# Altium PCB EST_MainV20.PcbDoc (part 7 of 8)
Units mm, origin at the board's own origin, x right, y up, seen from the top; angles counter-clockwise.
Board outline 69.72 x 115.32 mm, 2 copper layers (Top Layer, Bottom Layer); 330 components, 239 nets, 1066 pads, 416 vias.
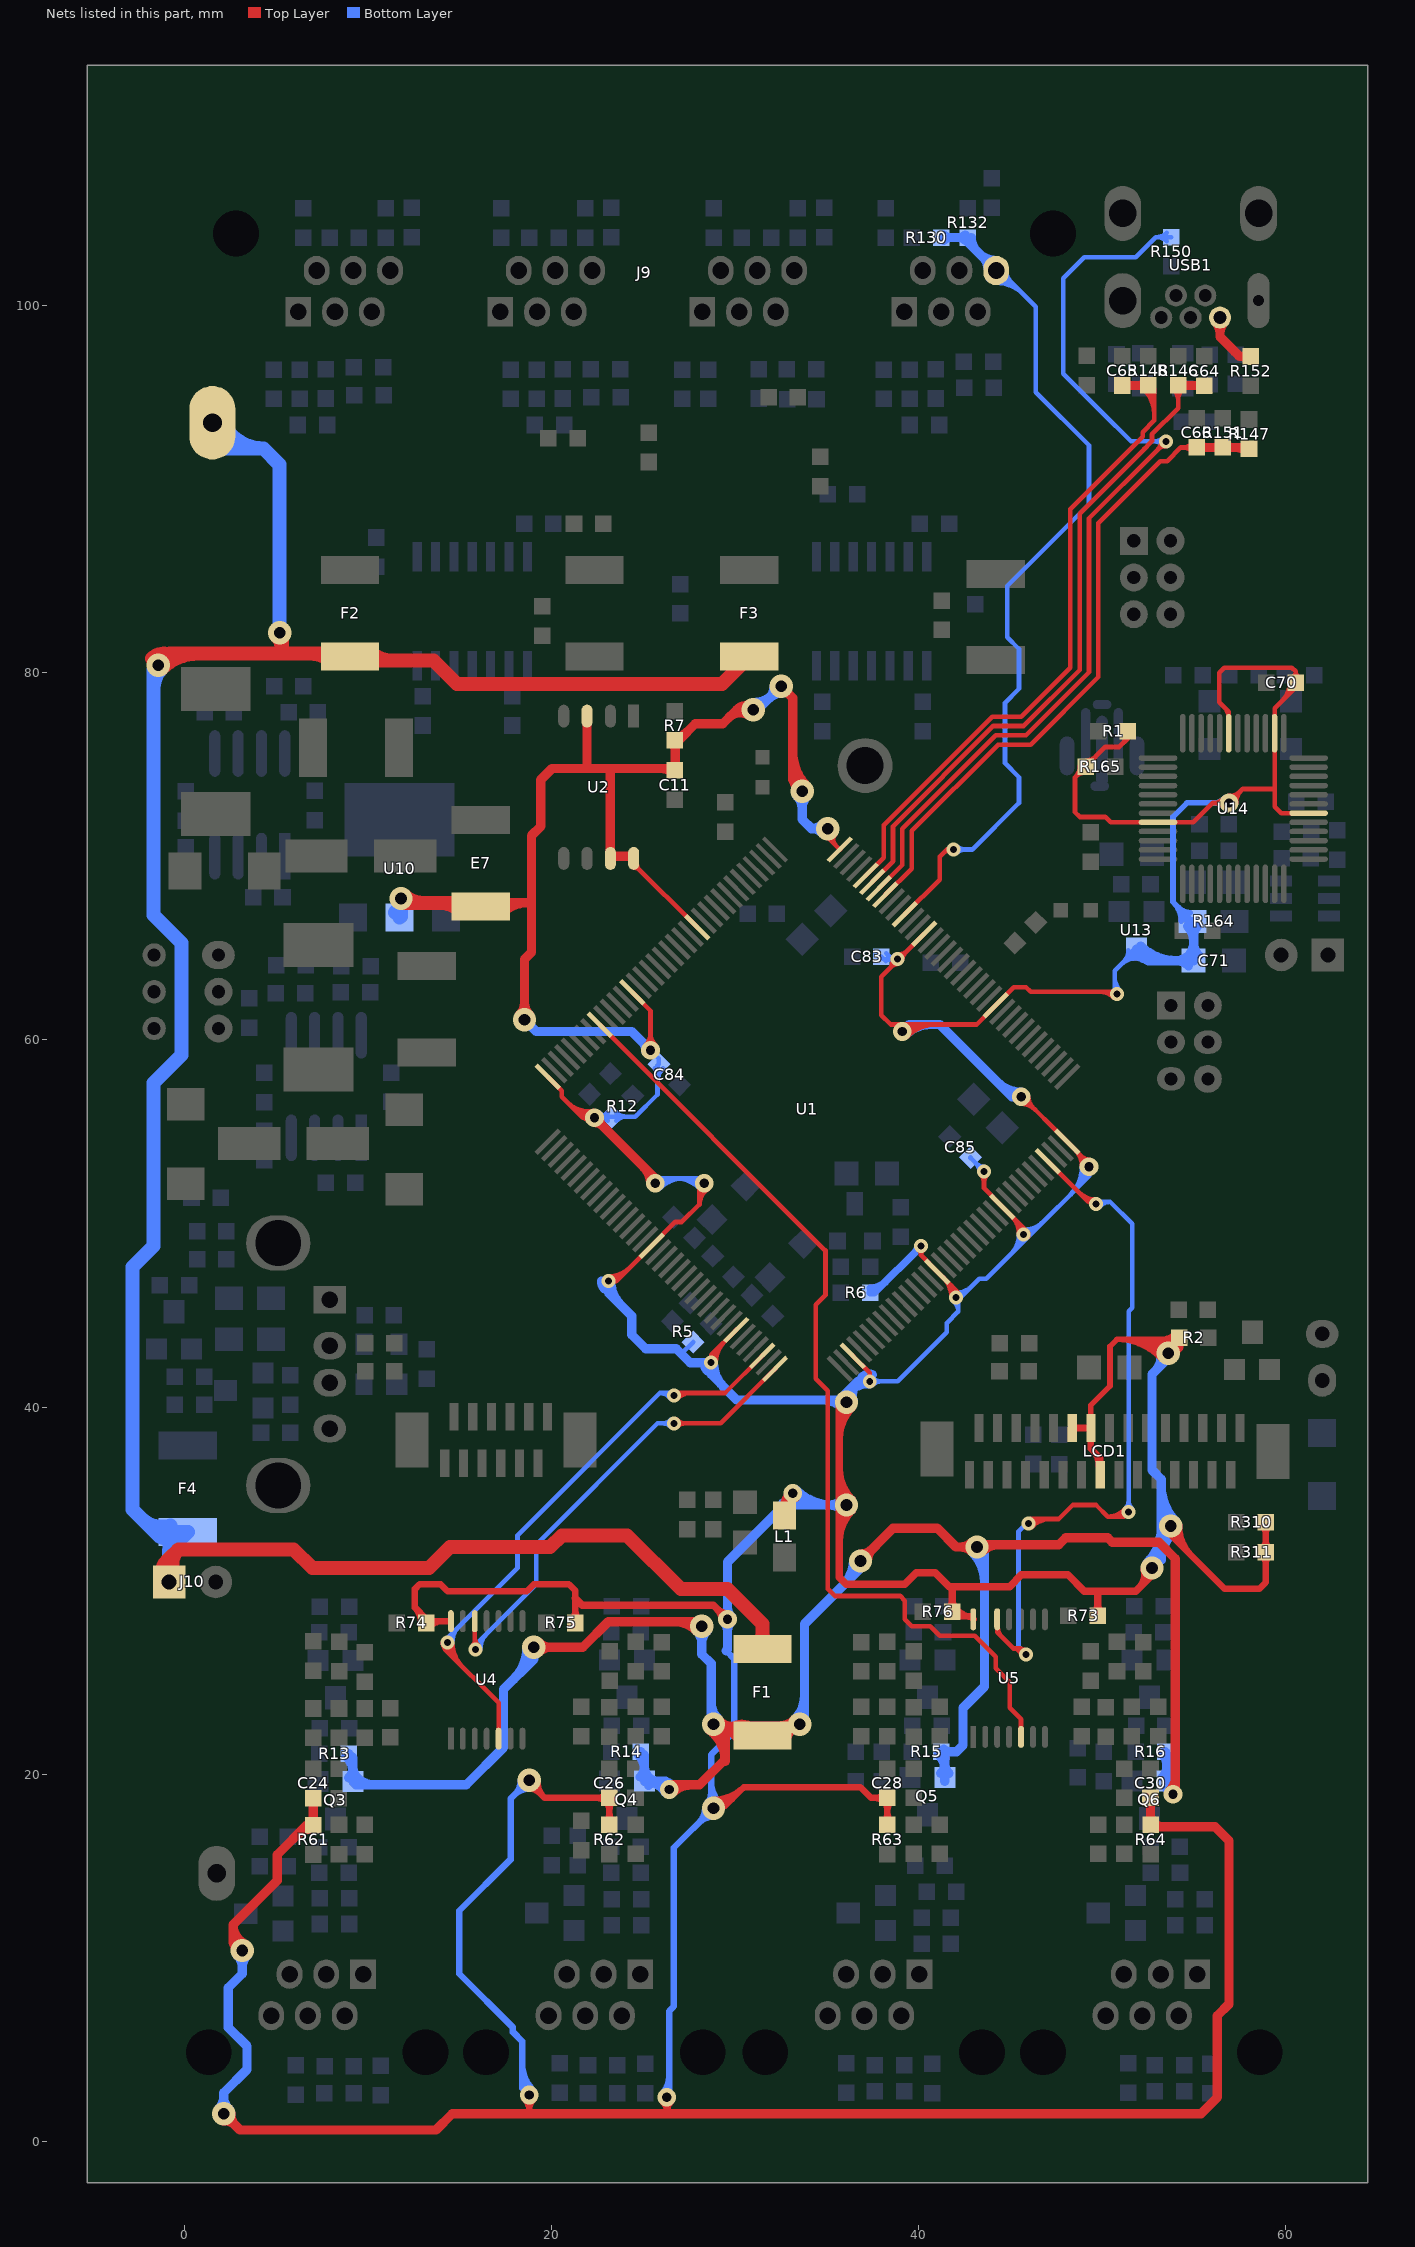
[diagram p7: the nets of this part, all layers, seen from the top]

## Via types
v1: diameter 0.762, hole 0.381, Top Layer to Bottom Layer, 258 vias
v2: diameter 1.27, hole 0.635, Top Layer to Bottom Layer, 91 vias
v3: diameter 1.016, hole 0.508, Top Layer to Bottom Layer, 66 vias
v4: diameter 1.524, hole 0.635, Top Layer to Bottom Layer, 1 vias

## Nets (pads, with @x,y where several pads share a name; then routed paths per layer and width w, separated by ;. In a path a pad name is that pad's centre, name@x,y a point inside that pad or via, vN(x,y) a via of type N, cw(c..) or ccw(c..) an arc to the next point about the centre after c; other vN are vias at no path point) (continued)
TACHOD1: J9.24 R130.1 R132.2 U1.98 | length 56.4
  Top Layer w0.254: U1.98@39.251,66.826 41.148,68.723 41.148,69.977 41.529,70.358 v1(41.91,70.358) ccw(c41.826,69.657) 41.327,70.156
  Bottom Layer w0.254: v1(41.91,70.358) 42.926,70.358 45.466,72.898 45.466,74.295 44.704,75.057 44.704,78.359 45.466,79.121 45.466,81.28 44.831,81.915 44.831,84.709 49.276,89.154 49.276,92.369 46.38,95.265 46.38,99.924 44.914,101.39 J9.24@44.221,101.39 ; v1@42.09,70.178 cw(c42.523,69.745) 42.523,70.358 cw(c42.523,70.971) v1@42.09,70.538 ; J9.24@43.819,101.39 J9.24@44.221,101.39 ; J9.24@44.221,101.217 cw(c44.221,99.125) 45.7,100.604 ; J9.24@44.221,101.471 cw(c44.221,99.992) 45.266,101.038 ; J9.24@44.406,101.39 J9.24@44.221,101.39 ; J9.24@44.794,101.79 ccw(c45.469,101.79) 44.992,101.312
  Bottom Layer w0.508: R130.1@41.224,103.682 R132.2@42.672,103.683 ; R130.1@41.363,103.544 cw(c41.699,103.208) 41.699,103.683 ; R130.1@41.363,103.821 ccw(c41.696,104.154) 41.696,103.683 ; R132.2@42.534,103.544 ccw(c42.199,103.21) 42.199,103.683 ccw(c42.199,104.156) R132.2@42.534,103.822 ; R132.2@42.672,103.438 J9.24@44.221,101.89 ; R132.2@42.868,103.683 ccw(c43.932,103.683) 43.18,102.931 ; 43.289,102.822 ccw(c44.221,103.754) J9.24@44.221,102.436 ; 43.53,102.58 cw(c42.94,101.99) J9.24@43.775,101.99 ; J9.24@44.221,101.39 J9.24@44.221,101.448
TXINA: U1.34 U4.5 | length 37
  Top Layer w0.254: v1@14.097,27.178 ccw(c14.71,27.178) 14.277,26.744 ; v1@14.224,27.178 14.224,26.797 17.129,23.892 U4.5@17.129,21.946 ; v1(14.351,27.178) ccw(c15.577,27.178) 14.71,26.311 ; v1@14.605,27.178 ccw(c16.445,27.178) 15.144,25.877 ; v1(26.67,40.64) 26.797,40.767 29.455,40.767 U1.34@31.472,42.784 ; v1@26.85,40.46 cw(c27.59,39.72) 27.59,40.767
  Bottom Layer w0.254: v1@14.224,27.178 14.224,27.305 18.161,31.242 18.161,33.02 25.908,40.767 ; v1(14.351,27.178) cw(c14.964,27.178) 14.531,27.612 ; v1@14.605,27.178 cw(c15.831,27.178) 14.964,28.045 ; v1@26.467,40.488 ccw(c25.908,40.069) 25.908,40.767 ; v1@26.543,40.767 25.908,40.767
TXINB: U1.36 U4.12 | length 29.9
  Top Layer w0.254: v1@15.695,26.977 ccw(c15.373,27.299) 15.829,27.299 ; 15.829,27.522 ccw(c16.6,27.522) v1@16.055,26.977 ; U4.12@15.829,28.346 15.829,26.843 v1(15.875,26.797) ; v1(26.67,39.116) 29.218,39.116 U1.36@32.18,42.077 ; v1@26.85,38.936 cw(c27.283,38.503) 27.283,39.116 cw(c27.283,39.729) v1@26.85,39.296
  Bottom Layer w0.254: 16.055,27.231 ccw(c16.488,26.797) v1(15.875,26.797) 15.875,27.051 19.177,30.353 19.177,32.512 25.781,39.116 v1(26.67,39.116) ; v1@16.129,26.797 cw(c17.355,26.797) 16.488,27.664 ; v1@26.49,38.936 ccw(c26.057,38.503) 26.057,39.116 ccw(c26.057,39.729) v1@26.49,39.296
TXINC: U1.136 U5.5 | length 52.7
  Top Layer w0.254: U1.136@22.634,60.816 34.925,48.524 34.925,46.101 34.392,45.568 34.392,41.554 35.052,40.894 35.052,31.115 35.052,30.099 35.433,29.718 38.989,29.718 39.243,29.464 39.243,28.448 39.624,28.067 40.64,28.067 41.148,27.559 43.053,27.559 44.196,26.416 44.196,25.781 44.831,25.146 ; 44.704,25.273 44.831,25.146 ; U5.5@45.577,22.047 45.577,23.003 44.958,23.622 44.958,25.019 44.831,25.146
TXIND: U1.69 U5.12 | length 46.9
  Top Layer w0.254: U5.12@44.277,28.447 44.277,27.732 45.149,26.86 ; U5.12@44.31,28.007 ccw(c45.053,28.007) 44.528,27.481 ; 45.459,26.86 cw(c45.459,26.465) v1(45.847,26.543) 45.53,26.86 45.149,26.86 ; v1@45.598,26.493 ccw(c45.149,26.402) 45.149,26.861 ; v1(45.974,33.655) cw(c46.587,33.042) 46.587,33.909 ; v1@46.101,33.909 47.625,33.909 48.387,34.671 49.657,34.671 50.292,34.036 ; v1@46.154,33.475 cw(c47.2,32.429) 47.2,33.909 ; U1.69@47.029,53.391 49.239,51.181 v1@49.784,51.181 ; 48.726,51.694 ccw(c49.657,52.624) v1@49.657,51.308 ; 49.16,51.26 ccw(c49.657,51.757) v1(49.657,51.054) ; 50.864,34.036 ccw(c50.864,34.806) v1(51.435,34.29) 51.181,34.036 50.292,34.036 ; v1@51.246,34.46 cw(c50.292,35.322) 50.292,34.036
  Bottom Layer w0.254: v1(45.847,26.543) 45.441,26.949 45.441,33.249 v1@46.101,33.909 ; v1@49.784,51.181 50.419,51.181 ; v1@49.86,50.902 cw(c50.419,50.483) 50.419,51.181 ; v1@51.255,34.47 ccw(c50.822,34.903) 51.435,34.903 ccw(c52.048,34.903) v1@51.615,34.47 ; v1(51.435,34.29) 51.435,45.212 51.626,45.403 51.626,49.975 50.419,51.181
USB_DET: C66.2 R147.1 R151.2 U1.101 | length 40.1
  Top Layer w0.254: U1.101@38.19,67.887 39.624,69.321 39.624,71.374 44.323,76.073 46.101,76.073 49.784,79.756 49.784,88.138 53.15,91.504 53.531,91.504 54.283,92.256 C66.2@55.147,92.256 ; C66.2@54.919,92.028 ccw(c54.368,91.476) 54.368,92.256 ccw(c54.368,93.036) C66.2@54.919,92.484
  Top Layer w0.508: C66.2@55.147,92.256 57.909,92.256 R147.1@57.989,92.177 ; C66.2@55.286,92.117 cw(c55.621,91.783) 55.621,92.256 cw(c55.621,92.729) C66.2@55.286,92.395 ; 56.085,92.256 cw(c56.085,91.773) R151.2@56.427,92.114 ; 56.099,92.256 ccw(c56.099,92.719) R151.2@56.427,92.392 ; R151.2@56.704,92.114 cw(c57.046,91.773) 57.046,92.256 ; R151.2@56.704,92.392 ccw(c57.031,92.719) 57.031,92.256 ; 57.324,92.256 cw(c57.324,91.512) R147.1@57.85,92.038
USB_P: R152.1 USB1.1 | length 5.5
  Top Layer w0.508: USB1.1@56.165,99.082 cw(c55.575,98.491) 56.41,98.491 cw(c57.245,98.491) USB1.1@56.655,99.082 ; USB1.1@56.41,99.327 56.41,98.276 57.214,97.472 ; 57.433,97.253 57.214,97.472 ; R152.1@57.951,97.067 ccw(c57.616,96.733) 57.616,97.206 ccw(c57.616,97.679) R152.1@57.951,97.344 ; R152.1@58.089,97.206 57.48,97.206 57.214,97.472
USBDM: C64.2 R146.1 U1.103 | length 38.9
  Top Layer w0.254: U1.103@37.483,68.594 38.608,69.719 38.608,71.628 44.069,77.089 45.72,77.089 48.768,80.137 48.768,88.646 52.197,92.075 ; 52.324,92.202 52.197,92.075 ; R146.1@53.899,95.403 cw(c53.348,94.851) 54.128,94.851 cw(c54.908,94.851) R146.1@54.356,95.403 ; R146.1@54.128,95.631 54.128,94.387 52.705,92.964 52.705,92.583 52.197,92.075
  Top Layer w0.508: R146.1@54.128,95.631 55.532,95.631 C64.2@55.554,95.609 ; R146.1@54.266,95.492 cw(c54.601,95.158) 54.601,95.631 cw(c54.601,96.104) R146.1@54.266,95.77 ; 55.027,95.631 cw(c55.027,95.082) C64.2@55.415,95.47
USBDP: C65.1 R148.1 U1.104 | length 40.7
  Top Layer w0.254: U1.104@37.129,68.947 38.1,69.918 38.1,71.695 44.002,77.597 45.593,77.597 48.26,80.264 48.26,88.9 52.197,92.837 52.197,93.091 52.832,93.726 52.832,95.174 52.502,95.504 R148.1@52.502,95.631 ; R148.1@52.274,95.403 cw(c50.926,94.055) 52.832,94.055 ; R148.1@52.453,95.582 cw(c51.539,94.668) 52.832,94.668 ; R148.1@52.548,95.311 cw(c52.585,95.054) 52.768,95.238 cw(c52.872,95.342) R148.1@52.757,95.432 ; R148.1@52.633,95.762 cw(c52.153,95.281) R148.1@52.832,95.281
  Top Layer w0.508: C65.1@51.078,95.631 R148.1@52.502,95.631 ; C65.1@51.214,95.489 cw(c51.556,95.148) 51.556,95.631 ; C65.1@51.214,95.767 ccw(c51.541,96.094) 51.541,95.631 ; R148.1@52.364,95.492 ccw(c52.029,95.158) 52.029,95.631 ccw(c52.029,96.104) R148.1@52.364,95.77
USBID: R150.1 U1.102 | length 56.7
  Top Layer w0.254: U1.102@37.836,68.24 39.116,69.52 39.116,71.501 44.196,76.581 45.847,76.581 49.276,80.01 49.276,88.392 52.959,92.075 ; 53.086,92.202 52.959,92.075 ; v1@53.213,92.583 cw(c52.6,92.583) 53.033,92.149 cw(c53.467,91.716) v1@53.467,92.329 ; v1(53.467,92.583) 52.959,92.075
  Bottom Layer w0.254: 48.26,95.885 49.975,94.17 ; v1@53.287,92.403 ccw(c52.854,91.97) 52.854,92.583 ccw(c52.854,93.196) v1@53.287,92.763 ; v1(53.467,92.583) 51.562,92.583 49.975,94.17 ; R150.1@53.518,103.48 ccw(c52.967,102.928) 52.967,103.708 ccw(c52.967,104.488) R150.1@53.518,103.937 ; R150.1@53.747,103.708 52.908,103.708 51.816,102.616 49.022,102.616 47.879,101.473 47.879,96.266 49.975,94.17
V9: F1.2 Q3.1 Q4.1 Q5.1 Q6.1 R13.1 R14.1 R15.1 R16.1 | length 157.6
  Top Layer w0.508: v2(19.05,26.924) 20.701,26.924 ; 19.685,26.924 20.701,26.924 ; 23.368,28.321 26.289,28.321 ; v3@26.416,19.431 28.067,19.431 29.464,20.828 29.464,22.225 29.845,22.606 ; v3@26.596,18.997 cw(c27.642,17.951) 27.642,19.431 ; 26.661,28.321 cw(c26.661,26.534) v2@27.925,27.798 ; v2@28.194,28.321 26.289,28.321 ; v2@28.603,22.426 cw(c27.353,20.725) 29.464,20.725 ; v2@28.904,22.835 cw(c28.091,21.729) 29.464,21.729 ; v2@29.134,22.962 ccw(c29.845,23.495) 29.845,22.606 ; 29.665,22.426 cw(c30.381,21.711) F1.2@30.962,22.539 ; 29.773,22.606 cw(c29.773,21.531) F1.2@30.67,22.123 ; F1.2@30.247,21.843 ccw(c28.829,20.907) 28.829,22.606 29.845,22.606 ; F1.2@31.293,22.606 29.845,22.606 ; F1.2@31.394,22.631 29.87,22.631 29.845,22.606 ; F1.2@31.496,22.631 v2@33.68,22.631 ; F1.2@32.321,22.123 cw(c33.001,21.923) F1.2@33.001,22.631 ; F1.2@32.363,22.631 ccw(c32.363,23.898) v2@33.259,23.002 ; F1.2@32.809,21.98 cw(c33.68,21.723) v2@33.68,22.631 ; F1.2@32.853,22.631 cw(c32.853,22.058) v2@33.259,22.464 ; v2@33.782,22.733 v2@33.68,22.631 ; v2(36.83,31.623) 38.608,33.401 41.021,33.401 42.037,32.385 v2(43.18,32.385) 43.307,32.512 44.45,32.512 47.625,32.512 48.006,32.893 50.292,32.893 50.546,32.639 53.086,32.639 53.975,31.75 53.975,30.988 ; v2@36.83,32.004 ccw(c36.83,32.924) 37.48,32.273 ccw(c38.131,31.623) v2@37.211,31.623 ; v2@42.911,32.116 ccw(c42.26,31.465) 42.26,32.385 ccw(c42.26,33.305) v2@42.911,32.654 ; v2@43.449,32.116 cw(c44.406,31.159) 44.406,32.512 ; v3@53.668,19.103 ccw(c52.928,19.843) 53.975,19.843 ; v3@53.975,19.177 53.975,30.988 ; 53.975,31.623 53.975,30.988 ; 19.97,26.924 cw(c19.97,27.844) 19.319,27.193 ccw(c19.97,27.844) 19.97,26.924 ; 19.97,26.924 ccw(c19.97,26.004) 19.319,26.655 cw(c19.97,26.004) 19.97,26.924 ; 20.701,26.924 21.717,26.924 23.114,28.321 26.289,28.321
  Bottom Layer w0.508: R13.1@8.833,20.987 cw(c7.946,20.1) Q3.1@9.2,20.1 ; R13.1@8.971,21.125 9.2,20.897 Q3.1@9.2,19.602 9.366,19.435 15.371,19.435 17.399,21.463 17.399,24.638 19.05,26.289 v2(19.05,26.924) ; Q3.1@8.975,19.826 ccw(c8.433,20.368) 9.2,20.368 ccw(c9.966,20.368) 9.424,19.826 ccw(c10.368,20.769) 10.368,19.435 ; 17.951,25.19 ccw(c16.216,26.924) v2@18.669,26.924 ; 18.818,26.057 ccw(c17.951,26.924) v2@19.177,26.924 ; R14.1@24.728,21.095 cw(c23.903,20.27) 25.07,20.27 ; Q4.1@24.845,19.859 ccw(c24.303,20.401) 25.07,20.401 ccw(c25.836,20.401) 25.294,19.859 ccw(c25.836,20.401) 25.836,19.634 ccw(c25.836,18.868) Q4.1@25.294,19.41 ; R14.1@24.867,21.234 25.07,21.031 Q4.1@25.07,19.634 ; 26.031,19.634 cw(c26.031,18.915) v3@26.626,19.32 ; v3@26.206,19.034 ccw(c25.07,18.259) Q4.1@25.07,19.634 ; v3@26.416,19.431 26.213,19.634 Q4.1@25.07,19.634 ; v2@27.925,27.798 cw(c27.274,27.147) 28.194,27.147 cw(c29.114,27.147) v2@28.463,27.798 ; v2@28.194,28.321 v2(28.194,28.067) 28.194,26.543 28.702,26.035 28.702,22.86 v2(28.829,22.733) ; 28.702,23.959 ccw(c30.055,23.959) v2@29.098,23.002 ; v2@33.259,23.002 ccw(c31.995,24.266) 33.782,24.266 ; v2@33.782,22.733 33.782,28.194 36.83,31.242 v2(36.83,31.623) ; 35.91,30.322 ccw(c34.609,31.623) v2@36.449,31.623 ; R15.1@41.086,21.095 cw(c40.26,20.27) Q5.1@41.427,20.27 ; Q5.1@41.203,20.062 ccw(c40.661,20.604) 41.427,20.604 ccw(c42.194,20.604) Q5.1@41.652,20.062 ; R15.1@41.363,21.095 cw(c41.697,20.761) 41.697,21.234 cw(c41.697,21.707) R15.1@41.363,21.373 ; Q5.1@41.427,19.634 41.427,21.031 R15.1@41.224,21.234 42.062,21.234 42.418,21.59 42.418,23.622 43.586,24.79 43.586,31.979 v2(43.18,32.385) ; v2@42.911,32.116 cw(c41.279,30.484) 43.586,30.484 ; v2@43.27,32.475 cw(c42.505,31.71) 43.586,31.71 ; R16.1@53.278,21.095 cw(c52.698,20.516) 53.518,20.516 ; Q6.1@53.293,19.859 ccw(c52.751,20.401) 53.518,20.401 ccw(c54.284,20.401) Q6.1@53.742,19.859 ; R16.1@53.416,21.234 53.518,21.132 Q6.1@53.518,19.634 ; v3(53.848,18.923) 53.518,19.253 Q6.1@53.518,19.634 ; Q6.1@53.897,19.172 cw(c53.989,19.634) Q6.1@53.518,19.634
  other v2: 33.528,22.733
  other v3: 26.416,19.177
V33: C11.2 C24.1 C26.1 C28.1 C30.1 C70.1 C71.2 C83.1 C84.1 C85.1 E7.1 L1.2 LCD1.16 LCD1.17 LCD1.19 R1.2 R2.1 R5.2 R6.1 R7.2 R12.2 R61.1 R62.1 R63.1 R64.1 R73.1 R74.1 R75.1 R76.1 R164.2 R165.1 R310.1 R311.1 U1.17 U1.30 U1.39 U1.52 U1.62 U1.72 U1.84 U1.95 U1.108 U1.121 U1.131 U1.144 U2.3 U2.7 U2.8 U4.14 U5.14 U10.2 U13.3 U14.6 U14.14 U14.19 U14.32 | length 722.1
  Top Layer w0.254: U1.144@19.805,57.987 20.574,57.218 20.574,56.896 21.717,55.753 ; 20.892,56.578 ccw(c22.028,57.715) v3@22.29,56.129 ; 21.241,56.229 ccw(c22.127,57.115) v3@22.331,55.878 ; 21.591,55.879 ccw(c22.226,56.514) v3@22.373,55.628 ; v3@22.016,55.574 ccw(c21.717,55.414) 21.717,55.753 ; v3@22.016,55.932 cw(c21.717,56.092) 21.717,55.753 ; v3(22.352,55.753) 21.717,55.753 ; v1@23.114,47.117 ccw(c23.114,48.735) 24.258,47.591 ; 23.825,47.157 cw(c23.114,47.868) v1(23.114,46.863) 23.53,46.863 U1.17@25.462,48.795 26.751,50.084 27.097,50.084 28.067,51.054 v3@28.067,52.451 ; U1.131@24.401,62.583 25.4,61.585 v3(25.4,59.436) ; U2.8@24.486,69.377 cw(c24.486,68.912) 24.815,69.241 ; U2.8@24.486,69.875 24.486,69.57 U1.121@27.937,66.119 ; U2.8@24.659,69.55 ccw(c25.028,69.55) 24.767,69.289 ; v3@25.131,59.705 ccw(c24.48,60.356) 25.4,60.356 ccw(c26.32,60.356) v3@25.669,59.705 ; v3@25.654,52.451 v3@25.781,52.451 ; 28.067,51.026 cw(c29.083,51.026) v3@28.529,51.878 ; 28.067,51.494 cw(c28.778,51.494) v3@28.39,52.091 ; v1@28.956,42.418 cw(c30.594,42.418) U1.30@29.436,43.576 ; 29.002,43.142 ccw(c29.727,42.418) v1(28.702,42.418) 28.702,42.842 U1.30@30.058,44.199 ; v2(35.052,71.501) 35.052,71.025 U1.108@35.715,70.362 ; v2@35.249,71.341 ccw(c35.564,71.086) 35.278,70.799 ; v2@35.447,71.181 ccw(c35.784,70.907) 35.477,70.6 ; U1.39@36.422,42.784 37.338,41.869 v1(37.338,41.402) ; 38.377,63.831 ccw(c37.819,64.389) v1@38.608,64.389 ; 38.553,64.007 cw(c38.862,63.698) v1@38.862,64.135 ; v1@38.862,64.643 ccw(c38.862,65.432) 39.42,64.874 ; v3@39.026,60.542 cw(c39.729,59.839) 39.729,60.833 ; v1@39.116,64.389 cw(c39.553,64.389) 39.244,64.698 ; v3@39.206,60.362 cw(c40.342,59.226) 40.342,60.833 ; v3@39.385,60.183 cw(c40.956,58.612) 40.956,60.833 ; v1(40.132,48.768) 40.132,48.267 ; U1.95@40.311,65.765 37.973,63.427 37.973,61.341 38.481,60.833 43.157,60.833 U1.84@44.2,61.876 45.189,62.865 45.847,62.865 46.101,62.611 50.673,62.611 v1(50.8,62.484) ; U1.52@41.329,47.07 cw(c40.233,45.974) v1@41.783,45.974 ; 41.763,46.636 cw(c41.1,45.974) v1(42.037,45.974) ; v1@42.164,45.847 42.164,46.235 U1.52@41.018,47.381 40.132,48.267 ; v1@43.381,52.652 cw(c42.948,52.219) 43.561,52.219 cw(c44.174,52.219) v1@43.741,52.652 ; v1(43.561,52.832) 43.561,51.909 U1.62@44.554,50.916 45.974,49.496 v1@45.974,49.276 ; U1.62@45.041,50.429 cw(c44.015,49.403) v1@45.466,49.403 ; 45.475,49.995 cw(c44.882,49.403) v1(45.72,49.403) ; v3@45.518,57.023 U1.72@48.089,54.452 v3@49.276,53.265 ; v3@45.593,56.515 cw(c45.593,55.469) 46.332,56.209 ; v3@45.974,56.896 ccw(c46.768,56.896) 46.207,56.335 ; U1.72@48.499,54.042 cw(c47.543,53.086) v3@48.895,53.086 ; R165.1@48.775,74.879 cw(c47.995,74.879) 48.547,74.327 cw(c49.098,73.776) R165.1@49.098,74.556 ; 48.933,53.609 cw(c48.41,53.086) v3@49.149,53.086 ; 48.931,53.61 ccw(c49.276,53.954) v3@49.276,53.467 ; R165.1@49.098,75.202 ccw(c49.098,75.982) 49.65,75.43 ccw(c50.201,74.879) R165.1@49.421,74.879 ; 49.88,62.611 cw(c49.88,61.564) v1@50.62,62.304 ; 51.13,76.149 ccw(c50.9,76.379) R1.2@51.143,76.594 ; 51.32,76.339 ccw(c51.102,76.558) R1.2@51.333,76.763 ; R1.2@51.384,76.809 51.384,76.403 50.927,75.946 50.165,75.946 R165.1@49.098,74.879 48.514,74.295 48.514,72.644 48.514,72.39 48.768,72.136 50.165,72.136 50.458,71.843 U14.32@53.033,71.843 54.952,71.843 56.007,72.898 ; v3@56.62,72.635 ccw(c56.007,72.051) 56.007,72.898 ; v3@56.62,73.161 cw(c56.007,73.745) 56.007,72.898 ; 56.652,78.095 cw(c56.151,77.593) U14.19@56.86,77.593 ; U14.19@56.883,76.693 56.883,77.864 56.363,78.384 56.363,79.985 56.642,80.264 60.325,80.264 60.531,80.058 ; v3@56.896,73.279 ccw(c56.896,74.199) 57.546,73.548 ccw(c58.197,72.898) v3@57.277,72.898 ; 59.805,78.474 ccw(c58.832,79.447) C70.1@60.208,79.447 ; 60.239,78.908 ccw(c59.699,79.447) C70.1@60.462,79.447 ; C70.1@60.349,79.714 ccw(c60.116,80.058) 60.531,80.058 ; C70.1@60.713,79.714 cw(c60.947,80.058) 60.531,80.058 ; U14.6@61.233,72.343 59.737,72.343 59.383,72.697 59.383,73.66 ; 40.132,48.267 cw(c40.499,48.267) 40.282,48.563 ccw(c40.499,48.267) 40.132,48.267 ; 40.132,48.267 ccw(c39.765,48.267) 39.982,48.563 cw(c39.765,48.267) 40.132,48.267 ; 56.007,72.898 v3(56.896,72.898) 57.658,73.66 59.383,73.66 ; 59.383,73.66 U14.14@59.383,76.693 59.383,78.052 60.531,79.2 C70.1@60.531,79.447 60.531,80.058
  Top Layer w0.305: LCD1.17@49.378,38.862 49.378,40.107 50.419,41.148 50.419,43.307 50.8,43.688 ; 51.484,43.688 cw(c51.484,41.028) v2@53.462,42.807 ; 52.169,43.688 cw(c52.169,41.644) v2@53.688,43.011 ; 52.853,43.688 cw(c52.853,42.259) v2@53.915,43.215 ; 53.215,43.688 ccw(c53.215,44.752) R2.1@53.968,44 ; v2@53.235,42.603 ccw(c50.8,40.413) 50.8,43.688 ; 53.537,43.688 cw(c53.537,42.875) R2.1@54.142,43.419 ; 53.704,43.688 cw(c53.704,43.315) R2.1@53.968,43.579 ; R2.1@54.178,43.789 54.077,43.688 50.8,43.688
  Top Layer w0.356: 12.557,29.099 cw(c11.702,28.245) R74.1@12.91,28.245 ; R74.1@13.183,28.245 13.183,28.473 12.573,29.083 12.573,30.099 12.827,30.353 13.97,30.353 14.351,29.972 14.986,29.972 ; R74.1@13.283,28.346 U4.14@14.529,28.346 ; R74.1@13.375,28.053 cw(c14.082,27.346) 14.082,28.346 ; 14.605,29.972 14.986,29.972 ; v3@18.563,2.307 cw(c17.999,1.743) 18.796,1.743 cw(c19.593,1.743) v3@19.029,2.307 ; 18.796,1.524 v3(18.796,2.54) ; v2@18.796,19.228 cw(c18.796,18.431) 19.36,18.994 ; v2@18.923,19.431 19.637,18.717 C26.1@23.161,18.717 R62.1@23.161,17.25 ; v2@19.252,19.65 ccw(c20.358,19.565) 19.574,18.78 ; R75.1@21.118,28.438 ccw(c20.653,28.902) 21.311,28.902 ccw(c21.968,28.902) R75.1@21.503,28.438 ; R75.1@21.311,28.245 21.311,29.591 21.311,29.997 20.955,30.353 19.05,30.353 18.669,29.972 14.986,29.972 ; C26.1@22.968,18.909 cw(c22.504,19.374) 22.504,18.717 cw(c22.504,18.06) 22.968,18.524 cw(c22.504,18.06) 23.161,18.06 cw(c23.818,18.06) C26.1@23.353,18.524 ; R62.1@22.972,17.439 ccw(c22.516,17.895) 23.161,17.895 ; 23.161,17.912 ccw(c23.83,17.912) R62.1@23.357,17.439 ; v3@26.063,2.172 cw(c25.575,1.651) 26.289,1.651 ; 26.289,1.524 26.416,1.651 ; v3(26.289,2.413) 26.289,1.651 ; v3@26.515,2.172 ccw(c27.003,1.651) 26.289,1.651 ; v2(28.829,18.161) 28.702,18.288 29.464,18.288 30.48,19.304 36.83,19.304 37.417,18.717 C28.1@38.299,18.717 38.299,17.25 R63.1@38.303,17.247 ; v2@28.829,18.263 ccw(c28.829,19.734) 29.87,18.694 ; v2@28.829,18.618 ccw(c28.829,20.948) 30.477,19.301 ; C28.1@38.107,18.909 cw(c37.642,19.374) 37.642,18.717 cw(c37.642,18.06) 38.107,18.524 cw(c37.642,18.06) 38.299,18.06 cw(c38.956,18.06) C28.1@38.492,18.524 ; R63.1@38.11,17.439 ccw(c37.654,17.895) 38.299,17.895 ; 38.299,17.912 ccw(c38.969,17.912) R63.1@38.495,17.439 ; R76.1@41.631,28.601 42.876,28.601 cw(c42.876,29.625) R76.1@42.053,29.016 ; 42.649,28.601 cw(c42.649,28.119) U5.14@42.989,28.46 ; LCD1.19@48.362,38.862 LCD1.17@49.378,38.862 49.378,37.744 49.886,37.236 LCD1.16@49.886,36.322 ; 49.469,37.653 cw(c48.639,36.822) LCD1.16@49.813,36.822 ; v2(53.721,33.528) 53.721,33.052 56.674,30.099 58.547,30.099 58.903,30.455 R311.1@58.903,32.106 R310.1@58.903,33.732 ; v2@53.823,33.528 ccw(c55.217,33.528) 54.231,32.542 ; v2@54.178,33.528 ccw(c56.431,33.528) 54.838,31.935 ; R311.1@58.71,31.914 cw(c58.245,31.449) 58.903,31.449 cw(c59.56,31.449) R311.1@59.095,31.914 ; R311.1@58.71,32.298 ccw(c58.245,32.763) 58.903,32.763 ccw(c59.56,32.763) R311.1@59.095,32.298 ; R310.1@58.71,33.539 cw(c58.245,33.074) 58.903,33.074 cw(c59.56,33.074) R310.1@59.095,33.539
  Top Layer w0.406: 21.311,29.591 21.692,29.21 28.829,29.21 v3(29.591,28.448) ; v3@29.286,28.448 ccw(c28.55,28.448) 29.071,28.968 ccw(c29.591,29.489) v3@29.591,28.753 ; L1.2@32.532,34.615 ccw(c32.438,34.85) 32.691,34.85 ; L1.2@32.691,34.005 cw(c33.881,34.005) v3@33.297,35.04 ; L1.2@32.691,34.087 32.691,34.85 ; L1.2@32.691,34.7 cw(c33.489,34.7) v3@33.097,35.395 ; L1.2@32.713,34.228 cw(c33.199,34.54) v3@32.79,34.949 ; L1.2@32.851,34.615 cw(c32.945,34.85) 32.691,34.85 ; L1.2@33.055,34.447 cw(c33.634,34.819) v3(33.147,35.306) 32.691,34.85 ; 35.687,32.709 cw(c38.03,32.709) v2@36.373,34.366 ; 35.687,33.69 cw(c37.049,33.69) v2@36.086,34.653 ; 35.687,35.652 ccw(c37.049,35.652) v2@36.086,34.689 ; 35.687,36.633 ccw(c38.03,36.633) v2@36.373,34.976 ; 35.687,38.297 cw(c38.03,38.297) v2@36.373,39.954 ; 35.687,39.278 cw(c37.049,39.278) v2@36.086,40.241 ; v2@35.941,40.64 35.687,40.386 35.687,30.734 36.068,30.353 39.243,30.353 39.878,30.988 40.894,30.988 41.656,30.226 41.834,30.226 ; R76.1@41.659,29.029 ccw(c41.238,29.451) 41.834,29.451 ccw(c42.43,29.451) R76.1@42.008,29.029 ; R76.1@41.834,28.855 41.834,30.226 ; R73.1@49.584,28.826 ccw(c49.163,29.247) 49.759,29.247 ccw(c50.354,29.247) R73.1@49.933,28.826 ; R73.1@49.587,28.829 ccw(c49.192,29.235) 49.759,29.235 ; R73.1@49.931,28.829 cw(c50.326,29.235) 49.759,29.235 ; 52.007,30.163 ccw(c51.267,30.902) v2@52.285,31.143 ; v2@52.832,31.369 52.832,30.988 51.816,29.972 49.759,29.972 ; 41.834,30.226 44.958,30.226 45.593,30.861 48.133,30.861 49.022,29.972 49.759,29.972 ; 49.759,29.235 R73.1@49.759,28.652 49.759,29.972
  Top Layer w0.508: v2@2.159,1.143 cw(c2.159,0.223) 2.809,0.874 cw(c3.46,1.524) v2@2.54,1.524 ; v2(2.159,1.524) 3.048,0.635 13.716,0.635 14.605,1.524 18.796,1.524 26.289,1.524 55.372,1.524 56.261,2.413 56.261,6.858 56.896,7.493 56.896,16.383 56.134,17.145 52.73,17.145 R64.1@52.628,17.247 52.625,17.25 C30.1@52.625,18.717 ; 2.667,11.013 ccw(c3.455,11.013) v2@3.121,10.299 ; v2(3.175,10.414) 2.667,10.922 2.667,11.811 ; v2@3.336,10.759 cw(c3.828,11.811) 2.667,11.811 ; 6.122,16.663 cw(c7.04,15.745) R61.1@7.04,17.043 ; C24.1@6.898,18.571 cw(c6.555,18.228) 7.04,18.228 ; R61.1@6.902,17.378 ccw(c6.567,17.713) 7.04,17.713 ccw(c7.513,17.713) R61.1@7.179,17.378 ; 7.04,18.245 cw(c7.501,18.245) C24.1@7.175,18.571 ; C24.1@7.04,18.706 R61.1@7.04,17.239 6.698,17.239 5.08,15.621 5.08,14.986 5.08,14.732 5.08,14.224 2.667,11.811 ; E7.1@15.646,67.462 16.154,67.462 18.821,67.462 18.923,67.564 ; E7.1@17.339,66.9 cw(c18.697,65.542) 18.697,67.462 ; E7.1@17.339,67.618 ccw(c17.716,67.995) E7.1@17.716,67.462 ; v2@18.273,61.356 ccw(c17.622,62.007) 18.542,62.007 ccw(c19.462,62.007) v2@18.811,61.356 ; v2(18.542,61.087) 18.542,64.389 18.923,64.77 18.923,67.564 ; U2.3@21.946,77.622 21.946,74.8 21.971,74.774 ; v3@22.352,55.499 cw(c22.352,54.886) 22.786,55.319 cw(c23.219,55.753) v3@22.606,55.753 ; v3(22.352,55.753) v3@25.654,52.451 ; U2.7@23.216,69.875 U2.7@23.216,69.987 ; 23.216,70.622 23.216,71.247 ; 23.216,74.749 23.216,71.247 ; U2.7@23.248,69.843 cw(c23.597,69.494) 23.597,69.987 ; 24.104,69.987 cw(c24.104,69.494) U2.8@24.453,69.843 ; U2.8@24.486,69.987 U2.7@23.216,69.987 ; 25.041,53.064 cw(c24.174,52.197) v3@25.4,52.197 ; 25.998,74.774 cw(c25.998,73.954) C11.2@26.578,74.534 ; C11.2@26.578,74.811 ccw(c26.174,75.216) 26.746,75.216 ; R7.2@26.582,76.163 cw(c26.186,75.767) 26.746,75.767 ; C11.2@26.717,74.673 26.615,74.774 21.971,74.774 ; R7.2@26.72,76.498 ccw(c26.72,77.463) 27.403,76.78 ; C11.2@26.746,74.778 R7.2@26.746,76.302 ; R7.2@26.924,76.302 27.838,77.216 29.337,77.216 30.099,77.978 ; 29.655,77.534 cw(c30.296,76.893) v2@30.783,77.657 ; 29.723,77.602 cw(c30.939,76.387) v2@30.992,78.105 ; 30.102,77.981 cw(c30.644,77.439) v2@31.056,78.085 ; v2@30.712,77.715 ccw(c30.099,77.131) 30.099,77.978 ; v2@30.712,78.241 cw(c30.099,78.825) 30.099,77.978 ; v2(30.988,77.978) 30.099,77.978 ; v2(32.512,79.248) 33.147,78.613 33.147,74.168 v2@33.528,73.787 ; 33.147,74.453 ccw(c34.575,74.453) v2@33.565,73.443 ; 33.147,75.679 ccw(c35.801,75.679) v2@33.924,73.802 ; C30.1@52.486,18.578 cw(c52.152,18.244) 52.625,18.244 cw(c53.098,18.244) C30.1@52.763,18.578 ; R64.1@52.49,17.385 ccw(c52.164,17.711) 52.625,17.711 ; 52.625,17.728 ccw(c53.11,17.728) 52.767,17.385 ccw(c53.347,17.965) 53.347,17.145 ; v2@53.594,42.672 54.178,43.256 R2.1@54.178,43.789 ; v2@53.861,42.939 ccw(c53.375,43.424) R2.1@54,43.708 ; R2.1@54.04,43.651 cw(c53.705,43.316) 54.178,43.316 cw(c54.651,43.316) R2.1@54.317,43.651 ; 18.923,67.564 18.923,71.12 19.431,71.628 19.431,74.168 20.037,74.774 21.971,74.774 ; U2.7@23.216,69.987 23.216,71.247
  Top Layer w0.762: v2(11.811,67.691) 12.04,67.462 E7.1@15.646,67.462 ; v2@11.991,67.871 ccw(c12.976,68.856) 12.976,67.462 ; 13.919,67.462 cw(c13.919,65.849) E7.1@15.059,66.99
  Bottom Layer w0.254: v3(22.352,55.753) 22.412,55.813 R12.2@23.302,55.813 ; v3@22.621,56.022 ccw(c23.127,56.528) R12.2@23.127,55.813 ; v3@22.643,55.507 cw(c23.302,54.951) R12.2@23.302,55.813 ; R12.2@23.073,55.585 ccw(c22.522,55.033) 22.522,55.813 ccw(c22.522,56.593) R12.2@23.073,56.042 ; R12.2@23.53,55.585 cw(c24.081,55.033) 24.081,55.813 cw(c24.081,56.593) R12.2@23.53,56.042 ; v3(25.4,59.436) 25.854,58.982 C84.1@25.854,58.671 25.781,58.598 25.781,57.023 24.571,55.813 R12.2@23.302,55.813 ; C84.1@25.626,58.443 cw(c25.251,58.068) 25.781,58.068 ; v3@25.744,52.107 cw(c26.574,51.277) 26.574,52.451 ; v3@25.781,52.451 v3@28.067,52.451 ; 25.781,57.715 cw(c26.811,57.715) C84.1@26.083,58.443 ; v3@25.923,51.928 cw(c27.187,50.664) 27.187,52.451 ; 26.788,52.451 cw(c26.788,50.664) v3@28.052,51.928 ; 27.106,42.926 R5.2@27.722,43.541 ; 27.401,52.451 cw(c27.401,51.277) v3@28.231,52.107 ; v1(37.338,41.402) 38.862,41.402 41.529,44.069 41.529,44.577 42.164,45.212 42.164,45.847 43.307,46.99 43.688,46.99 45.974,49.276 49.276,52.578 v3(49.276,53.086) ; v1@37.518,41.222 cw(c37.951,40.789) 37.951,41.402 cw(c37.951,42.015) v1@37.518,41.582 ; C83.1@37.976,64.52 38.107,64.389 v1(38.862,64.389) cw(c38.862,65.157) C83.1@38.238,64.709 ; C83.1@38.204,64.292 cw(c38.44,64.056) 38.44,64.389 ; v1@38.682,64.209 ccw(c38.249,63.776) 38.249,64.389 ccw(c38.249,65.002) v1@38.682,64.569 ; v1@41.882,45.772 cw(c41.444,45.202) 42.164,45.202 ; v1(42.037,45.974) ccw(c42.037,46.587) 42.471,46.154 ; v1@42.037,46.228 ccw(c42.037,47.454) 42.904,46.587 ; C85.1@42.827,53.597 42.827,53.566 v1(43.561,52.832) ; v1@43.307,52.832 ccw(c42.694,52.832) 43.127,53.266 ccw(c43.561,53.699) v1@43.561,53.086 ; 45.017,48.319 ccw(c43.933,49.403) v1@45.466,49.403 ; 45.451,48.753 ccw(c44.8,49.403) v1(45.72,49.403) ccw(c45.72,50.323) 46.37,49.672 ; v1@45.72,49.657 ccw(c45.72,51.19) 46.804,50.106 ; 48.266,51.568 ccw(c46.749,53.086) v3@48.895,53.086 ; 48.7,52.002 ccw(c47.616,53.086) v3@49.149,53.086 ; 49.134,52.436 ccw(c48.483,53.086) v3@49.403,53.086 ; v1@50.673,62.611 50.673,63.754 U13.3@51.867,64.948 ; 50.673,63.404 ccw(c51.72,63.404) v1@50.98,62.664 ; 51,64.081 cw(c51.867,63.213) U13.3@51.867,64.44 ; 51.153,64.234 ccw(c50.502,64.884) U13.3@51.422,64.884
  Bottom Layer w0.305: 53.848,71.628 53.848,69.342 ; 53.874,67.485 cw(c52.833,66.445) R164.2@54.305,66.445 ; 54.181,67.179 ccw(c54.788,67.786) R164.2@54.788,66.927 ; R164.2@54.394,66.965 cw(c53.874,66.445) R164.2@54.61,66.445 ; R164.2@54.915,66.445 53.848,67.512 53.848,69.342 ; v3@56.645,72.647 ccw(c56.038,72.04) 56.038,72.898 ccw(c56.038,73.756) v3@56.645,73.149 ; v3(56.896,72.898) 54.61,72.898 53.848,72.136 53.848,69.342
  Bottom Layer w0.356: v2@18.339,19.685 cw(c17.235,19.685) 18.016,18.905 cw(c18.796,18.124) v2@18.796,19.228 ; 18.415,3.398 ccw(c19.654,3.398) v3@18.778,2.522 ; 18.415,4.257 ccw(c20.513,4.257) v3@19.029,2.773 ; v3(18.796,2.54) 18.415,2.921 18.415,5.461 17.907,5.969 17.907,6.223 14.986,9.144 14.986,12.573 17.78,15.367 17.78,18.669 18.542,19.431 v2@18.923,19.431 ; v3@26.056,2.646 ccw(c25.185,3.517) 26.416,3.517 ; v3@26.416,2.413 26.416,7.112 26.67,7.366 26.67,16.002 28.702,18.034 v2@28.702,18.288 ; v2@28.372,18.161 cw(c27.268,18.161) 28.049,17.381 cw(c28.829,16.6) v2@28.829,17.704 ; v2@28.506,18.484 ccw(c28.032,18.958) 28.702,18.958 ; 28.702,19.571 ccw(c30.239,19.571) v2@29.152,18.484 ; v2(28.829,18.161) v2@28.702,18.288 ; 29.527,26.733 29.972,26.289 29.972,22.352 28.702,21.082 v2@28.702,18.288 ; 32.691,34.671 32.691,34.85 v3(33.147,35.306)
  Bottom Layer w0.406: R6.1@37.363,46.228 37.592,46.228 v1(40.132,48.768) ; R6.1@37.363,46.474 ccw(c37.363,47.621) 38.174,46.81 ; v1@39.954,48.768 cw(c39.525,48.768) 39.828,48.464 cw(c40.132,48.161) v1@40.132,48.59
  Bottom Layer w0.508: v2@1.89,1.793 ccw(c1.239,2.444) 2.159,2.444 ccw(c3.079,2.444) v2@2.428,1.793 ; v2(2.159,1.524) 2.159,2.667 3.429,3.937 3.429,5.207 2.413,6.223 2.413,8.382 3.175,9.144 v2(3.175,10.414) ; v2@2.906,10.145 cw(c2.255,9.494) 3.175,9.494 cw(c4.095,9.494) v2@3.444,10.145 ; v2(18.542,61.087) 19.177,60.452 24.384,60.452 v3(25.4,59.436) ; v1@22.733,46.863 ccw(c23.346,46.863) 22.913,46.429 ; v1(23.114,46.863) 23.114,46.228 24.384,44.958 24.384,43.942 25.146,43.18 26.797,43.18 27.559,42.418 v1(28.702,42.418) 28.702,41.783 30.099,40.386 35.687,40.386 36.703,41.402 ; v1@23.241,46.863 ccw(c25.081,46.863) 23.78,45.562 ; v3@25.146,59.436 ccw(c24.533,59.436) 24.966,59.87 ccw(c25.4,60.303) v3@25.4,59.69 ; v1@28.321,42.418 ccw(c28.934,42.418) 28.501,41.984 ; v1@28.829,42.418 ccw(c30.669,42.418) 29.368,41.117 ; v3@29.411,28.268 cw(c28.978,27.835) 29.591,27.835 cw(c30.204,27.835) v3@29.771,28.268 ; v3@29.411,28.628 ccw(c28.978,29.061) 29.591,29.061 ccw(c30.204,29.061) v3@29.771,28.628 ; 29.527,26.733 29.591,26.797 v3(29.591,28.448) 29.591,31.571 32.691,34.671 v2(36.068,34.671) ; v2(30.988,77.978) 31.242,77.978 v2(32.512,79.248) ; v2@30.988,78.359 ccw(c30.988,79.892) v2@32.072,78.808 ; v2@32.131,79.248 cw(c31.211,79.248) 31.862,78.598 cw(c32.512,77.947) v2@32.512,78.867 ; 32.608,34.767 ccw(c32.84,34.999) 32.84,34.671 ; v3@32.967,35.126 ccw(c34.067,36.226) 34.067,34.671 ; v3@33.327,35.486 ccw(c35.293,37.452) 35.293,34.671 ; v2@33.386,73.264 cw(c32.735,72.613) 33.655,72.613 cw(c34.575,72.613) v2@33.924,73.264 ; v2(33.655,73.533) 33.655,72.009 34.163,71.501 ; v2@34.776,71.238 ccw(c34.163,70.654) 34.163,71.501 ; v2@34.776,71.764 cw(c34.163,72.348) 34.163,71.501 ; 34.842,40.386 cw(c34.842,39.033) v2@35.799,39.99 ; v2(35.052,71.501) 34.163,71.501 ; v2@35.799,34.402 ccw(c35.148,33.751) 35.148,34.671 ccw(c35.148,35.591) v2@35.799,34.94 ; v2@36.037,40.736 cw(c37.338,39.435) v1@37.338,41.275 ; 36.386,41.085 cw(c36.994,40.476) v1@37.294,41.283 ; v2@36.434,40.364 cw(c37.45,40.655) 36.703,41.402 ; 36.904,41.603 cw(c37.338,41.17) 37.338,41.783 ; 36.946,41.645 cw(c37.297,41.293) 37.471,41.759 ; v1(37.338,41.402) 36.703,41.402 ; v3(39.116,60.452) 39.497,60.833 41.148,60.833 45.085,56.896 v3(45.593,56.896) ; v3@39.296,60.272 cw(c40.649,58.919) 40.649,60.833 ; 44.292,57.689 ccw(c45.593,58.99) v3@45.593,57.15 ; U13.3@51.732,64.75 ccw(c52.79,65.808) 52.79,64.311 ; U13.3@51.867,64.948 52.503,64.311 C71.2@54.974,64.311 ; U13.3@52.091,65.109 ccw(c54.017,67.034) 54.017,64.311 ; v2@52.436,31.511 ccw(c50.559,33.388) v2@53.213,33.388 ; v2@52.795,31.152 ccw(c51.785,32.162) 53.213,32.162 ; v2@52.832,31.369 53.213,31.75 53.213,36.068 52.705,36.576 52.705,41.783 v2@53.594,42.672 ; 52.832,41.91 ccw(c51.907,42.836) v2@53.214,42.906 ; 53.213,31.679 cw(c55.199,31.679) v2@53.959,33.23 ; 53.213,32.736 cw(c54.355,32.736) v2@53.642,33.627 ; 53.213,34.448 ccw(c54.641,34.448) v2@53.631,33.438 ; 53.213,35.674 ccw(c55.867,35.674) v2@53.99,33.797 ; R164.2@54.645,66.175 cw(c53.852,65.382) 54.974,65.382 ; C71.2@54.694,64.031 ccw(c54.018,63.355) 54.018,64.311 ccw(c54.018,65.267) 54.694,64.591 ccw(c54.018,65.267) 54.974,65.267 ccw(c55.93,65.267) C71.2@55.254,64.591 ; C71.2@54.915,64.37 C71.2@54.974,64.311 ; R164.2@54.915,66.445 54.974,66.386 C71.2@54.974,64.311 ; 54.974,65.668 cw(c55.692,65.668) R164.2@55.184,66.175
  Bottom Layer w0.762: U10.2@11.477,66.93 ccw(c10.777,67.691) v2(11.811,67.691) 11.811,66.726 U10.2@11.735,66.65
  other v2: 18.796,19.685 52.705,31.242 36.068,40.259 53.594,42.926
  other v3: 25.654,52.197 28.321,52.197
VBAT: F1.1 F2.1 F3.1 F4.2 J10.1 pad.0@1.546,93.6 | length 166.7
  Top Layer w0.762: v2@-1.756,80.75 cw(c-1.09,80.084) -1.09,81.026 ; v2(-1.397,80.391) -0.762,81.026 5.334,81.026 ; v2@-1.217,80.211 cw(c0.749,78.245) 0.749,81.026 ; J10.1@-1.172,30.839 ccw(c-2.039,31.706) -0.813,31.706 ccw(c0.414,31.706) J10.1@-0.454,30.839 ; J10.1@-1.016,30.327 cw(c-0.216,30.93) -0.924,31.639 ; J10.1@-0.813,30.48 -0.813,31.75 -0.305,32.258 ; J10.1@-0.407,30.786 cw(c0.49,31.463) -0.305,32.258 ; v2@5.027,81.989 cw(c4.287,81.249) 5.334,81.249 ; v2(5.207,82.169) 5.334,82.042 5.334,81.026 ; 6.929,81.026 cw(c6.929,79.586) F2.1@7.947,80.604 ; F2.1@10.137,81.143 ccw(c11.34,82.345) 11.34,80.645 ; 23.749,79.375 24.257,79.375 ; F3.1@30.785,80.874 29.286,79.375 24.257,79.375 ; F1.1@31.227,27.092 ccw(c30.576,27.742) 31.496,27.742 ccw(c32.416,27.742) F1.1@31.765,27.092 ; F1.1@31.496,27.33 31.496,28.194 29.591,30.099 27.051,30.099 24.13,33.02 20.574,33.02 19.939,32.385 14.478,32.385 13.335,31.242 6.985,31.242 5.969,32.258 -0.305,32.258 ; 5.334,81.026 8.89,81.026 F2.1@9.042,80.874 9.271,80.645 13.589,80.645 14.859,79.375 24.257,79.375
  Bottom Layer w0.762: -2.318,33.941 ccw(c-1.218,35.041) F4.2@-0.739,33.56 ; -1.651,79.165 cw(c-0.171,79.165) v2@-1.217,80.211 ; -1.437,33.06 ccw(c-0.787,33.709) F4.2@-0.505,32.835 ; v2(-1.397,80.391) -1.651,80.137 -1.651,66.802 -0.127,65.278 -0.127,59.182 -1.651,57.658 -1.651,48.768 -2.794,47.625 -2.794,34.417 -1.575,33.198 F4.2@0.203,33.198 -0.813,32.182 J10.1@-0.813,30.48 ; J10.1@-1.172,30.839 ccw(c-2.039,31.706) -0.813,31.706 ccw(c0.414,31.706) J10.1@-0.454,30.839 ; F4.2@-0.892,32.928 ccw(c-1.542,32.278) -1.542,33.198 ccw(c-1.542,34.118) F4.2@-0.892,33.467 ; -0.813,31.818 cw(c0.757,31.818) F4.2@-0.353,32.928 ; -0.813,32.164 cw(c0.027,32.164) F4.2@-0.42,32.875 ; pad.0@1.636,92.908 ccw(c2.926,93.733) 2.926,92.202 ; pad.0@1.651,92.202 4.318,92.202 ; pad.0@2.278,93.318 ccw(c4.318,94.624) 4.318,92.202 ; v2(5.207,82.169) 5.207,91.313 4.318,92.202